# Altium PCB SchematicBKP.PcbDoc (part 2 of 2)
Units mm, origin at the board's own origin, x right, y up, seen from the top; angles counter-clockwise.
Board outline 121.41 x 45.21 mm, 2 copper layers (Top Layer, Bottom Layer); 55 components, 98 nets, 201 pads, 241 vias.
Unrouted connection lines stored in the file: 65.
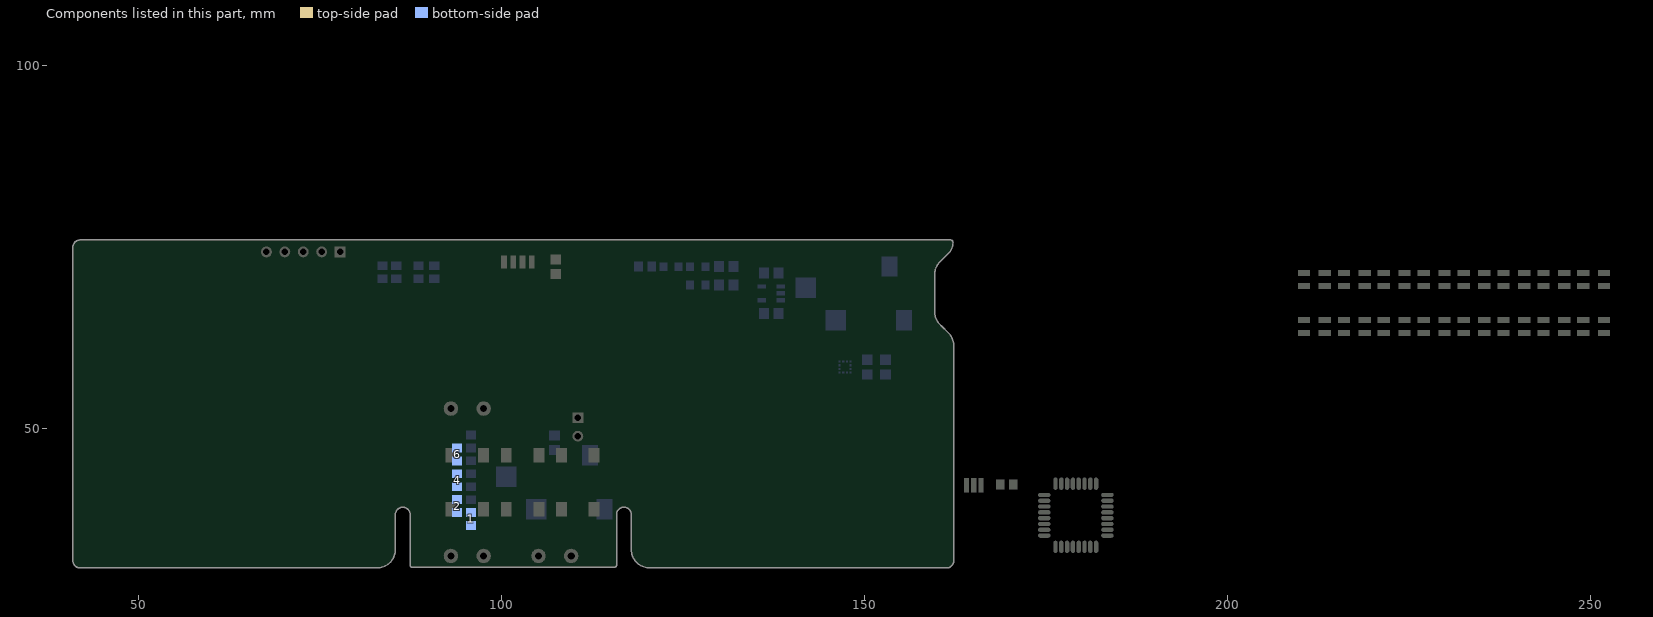
[diagram p2: the components of this part, seen from the top]

## Via types
v1: diameter 0.711, hole 0.4, Top Layer to Bottom Layer, 189 vias
v2: diameter 0.711, hole 0.4, Top Layer to Bottom Layer, tented bottom, 28 vias
v3: diameter 0.711, hole 0.4, Top Layer to Bottom Layer, tented top, 10 vias
v4: diameter 2, hole 2, Top Layer to Bottom Layer, 6 vias
v5: diameter 1.702, hole 1.702, Top Layer to Bottom Layer, 4 vias
v6: diameter 3, hole 1.5, Top Layer to Bottom Layer, 2 vias
v7: diameter 0.711, hole 0.4, Top Layer to Bottom Layer, tented both sides, 1 vias
v8: diameter 0.61, hole 0.4, Top Layer to Bottom Layer, 1 vias

## Nets (pads, with @x,y where several pads share a name; then routed paths per layer and width w, separated by ;. In a path a pad name is that pad's centre, name@x,y a point inside that pad or via, vN(x,y) a via of type N, cw(c..) or ccw(c..) an arc to the next point about the centre after c; other vN are vias at no path point) (continued)
copper on no net: | length 5399.9
  Top Layer w0.178: 44.704,35.56 v1(45.974,35.56) ; v1(48.895,34.29) 48.895,37.592 ; 49.403,37.465 49.276,37.338 49.276,35.179 49.53,34.925 v1(50.292,34.925) ; 49.911,37.338 49.657,37.084 49.657,35.814 49.911,35.56 v1(51.054,35.56) ; v1(50.292,36.195) 50.292,37.084 50.419,37.211 ; v1(52.07,37.592) 52.07,36.864 52.324,36.61 ; 54.356,37.338 54.356,35.179 54.61,34.925 v1(55.372,34.925) ; 54.864,37.211 54.737,37.084 54.737,35.814 54.991,35.56 v1(56.134,35.56) ; v1(55.372,36.195) 55.372,37.084 ; v1(57.023,37.592) 57.023,36.991 57.404,36.61 ; 57.404,34.51 57.404,35.306 57.658,35.56 58.039,35.56 ; 57.404,41.69 57.404,40.894 57.15,40.64 56.769,40.64 56.515,40.386 56.515,38.735 56.769,38.481 v1(57.658,38.481) ; 59.436,37.338 59.436,35.179 59.69,34.925 v2(60.452,34.925) ; 59.944,37.211 59.817,37.084 59.817,35.814 60.071,35.56 v2(61.214,35.56) ; v1(62.23,37.592) 62.23,36.864 62.484,36.61 ; v1(67.31,37.592) 67.31,36.864 67.564,36.61 ; 69.596,37.338 69.596,35.179 69.85,34.925 v2(70.612,34.925) ; 70.104,37.211 69.977,37.084 69.977,35.814 70.231,35.56 v2(71.374,35.56) ; v2(70.612,36.195) 70.612,37.084 ; v1(72.39,37.592) 72.39,36.864 72.644,36.61 ; 74.676,37.338 74.676,35.179 74.93,34.925 v2(75.692,34.925) ; 75.184,37.211 75.057,37.084 75.057,35.814 75.311,35.56 v2(76.454,35.56) ; v2(75.692,36.195) 75.692,37.084 ; v1(77.47,37.592) 77.47,36.864 77.724,36.61 ; 79.756,40.259 79.756,35.179 80.01,34.925 v2(80.772,34.925) ; 80.264,40.132 80.137,40.005 80.137,35.814 80.391,35.56 v2(81.534,35.56) ; v2(80.772,36.195) 80.518,36.449 80.518,39.751 80.772,40.005 ; 81.28,39.878 80.899,39.497 80.899,37.465 v2(81.534,36.83) ; v1(121.666,35.56) 122.682,35.56 123.063,35.941 123.063,40.005 122.936,40.132 ; v1(121.666,36.83) 122.301,37.465 122.301,39.497 121.92,39.878 ; v1(122.428,34.925) 122.809,34.925 123.444,35.56 123.444,40.259 ; v1(122.428,36.195) 122.682,36.449 122.682,39.751 122.428,40.005 ; 124.621,39.59 125.476,39.59 ; 124.621,44.67 125.476,44.67 ; 124.621,49.75 125.476,49.75 ; 124.621,54.83 125.476,54.83 ; 124.621,59.91 125.476,59.91 ; 124.621,64.99 125.476,64.99 ; 125.476,36.61 125.73,36.864 v1(125.73,37.592) ; v1(126.746,35.56) 127.762,35.56 128.143,35.941 128.143,37.084 128.016,37.211 ; v1(127.508,34.925) 127.889,34.925 128.524,35.56 128.524,37.338 ; 130.556,36.61 130.81,36.864 v1(130.81,37.592) ; v1(131.826,35.56) 132.842,35.56 133.223,35.941 133.223,37.084 133.096,37.211 ; v1(131.826,36.83) 131.826,37.465 ; v1(132.588,34.925) 132.969,34.925 133.604,35.56 133.604,37.338 ; 135.636,36.61 135.89,36.864 v1(135.89,37.592) ; 135.636,56.93 135.636,57.658 136.017,58.039 140.462,58.039 140.716,57.785 140.716,56.93 ; 138.883,59.97 138.938,60.025 ; 140.716,36.61 140.97,36.864 v1(140.97,37.592) ; v1(141.986,35.56) 143.002,35.56 143.383,35.941 143.383,37.084 143.256,37.211 ; v1(142.748,34.925) 143.129,34.925 143.764,35.56 143.764,37.338 ; 145.796,36.61 146.304,37.118 v1(146.304,37.592) ; v1(147.066,35.56) 148.082,35.56 148.463,35.941 148.463,37.084 148.336,37.211 ; v1(147.828,34.925) 148.209,34.925 148.844,35.56 148.844,37.338 ; v1(147.828,36.195) 147.828,37.084 ; 150.876,36.61 150.876,36.957 v1(151.511,37.592) ; v1(152.146,35.56) 153.162,35.56 153.543,35.941 153.543,37.084 153.416,37.211 ; v1(152.908,34.925) 153.289,34.925 153.924,35.56 153.924,37.338 ; 155.956,36.61 156.21,36.864 v1(156.21,37.592) ; v1(157.226,34.29) 158.369,34.29 ; v1(157.226,35.56) 158.242,35.56 158.623,35.941 158.623,36.716
  Top Layer w0.254: v1(43.688,50.546) 43.688,70.485 45.373,72.17 47.244,72.17 52.324,72.17 57.404,72.17 62.484,72.17 67.564,72.17 v1(68.834,72.17) ; v1(43.942,34.29) 43.434,34.798 43.434,48.895 44.45,49.911 44.45,66.421 45.119,67.09 47.244,67.09 ; 44.704,35.56 44.45,35.814 44.45,48.387 45.466,49.403 45.466,56.515 45.881,56.93 47.244,56.93 ; v1(45.212,34.925) 44.45,34.925 43.942,35.433 43.942,48.641 44.958,49.657 44.958,61.468 45.5,62.01 47.244,62.01 ; v1(45.212,36.195) 45.212,36.703 44.958,36.957 44.958,48.133 45.974,49.149 45.974,51.435 46.389,51.85 47.244,51.85 ; v1(45.974,36.83) 45.466,37.338 45.466,46.431 45.805,46.77 47.244,46.77 ; v1(46.863,37.592) 47.244,37.211 47.244,36.61 ; 47.244,34.51 47.244,35.306 47.498,35.56 48.133,35.56 48.387,35.814 48.387,62.992 47.244,64.135 47.244,64.99 47.244,65.659 47.498,65.913 48.006,65.913 48.387,66.294 48.387,70.07 ; 47.244,39.59 48.353,39.59 ; 47.244,41.69 46.262,41.69 45.974,41.402 45.974,38.735 46.355,38.354 v1(47.625,38.354) ; 47.244,44.67 48.353,44.67 ; 47.244,49.75 48.353,49.75 ; 47.244,54.83 48.353,54.83 ; 47.244,59.91 48.353,59.91 ; 47.244,70.07 48.387,70.07 ; 48.895,37.592 48.895,63.627 48.514,64.008 48.514,65.659 49.945,67.09 52.324,67.09 ; v1(48.895,71.12) 48.895,70.358 48.607,70.07 48.387,70.07 ; 49.403,37.465 49.403,61.722 49.691,62.01 52.324,62.01 ; 49.911,37.338 49.911,56.591 50.25,56.93 52.324,56.93 ; 50.419,37.211 50.419,51.435 50.834,51.85 52.324,51.85 ; v1(51.054,36.83) 50.927,36.957 50.927,46.482 51.215,46.77 52.324,46.77 ; 52.324,34.51 52.324,35.306 52.578,35.56 53.213,35.56 53.34,35.687 53.34,52.832 52.324,53.848 52.324,54.83 52.324,55.626 52.578,55.88 53.213,55.88 53.467,56.134 53.467,58.039 52.324,59.182 52.324,59.91 52.324,60.579 52.578,60.833 53.213,60.833 53.34,60.96 53.34,64.956 53.306,64.99 52.324,64.99 ; 52.324,39.59 53.306,39.59 ; 52.324,41.69 v1(52.324,42.926) ; 52.324,44.67 53.306,44.67 ; 52.324,49.75 53.306,49.75 ; 52.324,70.07 53.34,70.07 ; 53.34,64.99 53.34,70.07 ; v1(53.848,34.29) 53.848,51.308 54.991,52.451 54.991,66.294 55.787,67.09 57.404,67.09 ; v2(53.975,71.12) 53.975,70.358 53.687,70.07 53.34,70.07 ; 54.356,37.338 54.356,51.054 55.499,52.197 55.499,61.798 55.711,62.01 57.404,62.01 ; 54.864,37.211 54.864,50.8 56.007,51.943 56.007,56.515 56.422,56.93 57.404,56.93 ; 55.372,37.084 55.372,49.898 56.401,50.927 57.15,50.927 57.404,51.181 57.404,51.85 ; v1(56.134,36.83) 56.134,37.338 55.88,37.592 55.88,46.355 56.295,46.77 57.404,46.77 ; 57.404,39.59 58.386,39.59 ; 57.404,44.67 58.386,44.67 ; 57.404,49.75 58.386,49.75 ; 57.404,59.91 58.42,59.91 ; 57.404,64.99 58.386,64.99 ; 57.404,70.07 58.42,70.07 ; 58.039,35.56 58.166,35.56 58.42,35.814 58.42,52.942 57.404,53.958 57.404,54.83 57.404,55.499 57.658,55.753 58.166,55.753 58.42,56.007 58.42,59.91 ; v1(58.674,54.737) 58.674,55.355 58.928,55.609 58.928,62.103 v1(59.69,62.865) ; v1(58.928,34.29) 58.928,53.467 59.436,53.975 59.436,61.214 61.468,63.246 61.468,66.929 61.629,67.09 62.484,67.09 63.28,67.09 63.881,67.691 66.074,67.691 66.675,67.09 67.564,67.09 ; v2(59.055,71.12) 59.055,70.358 58.767,70.07 58.42,70.07 ; 59.436,37.338 59.436,53.213 59.944,53.721 59.944,60.96 60.994,62.01 62.484,62.01 62.484,63.119 62.738,63.373 67.31,63.373 67.564,63.119 67.564,62.01 ; 59.944,37.211 59.944,52.959 60.452,53.467 60.452,56.515 60.867,56.93 62.484,56.93 62.484,57.912 62.865,58.293 67.183,58.293 67.564,57.912 67.564,56.93 ; v2(60.452,36.195) 60.452,51.308 60.994,51.85 62.484,51.85 ; v2(61.214,36.83) 61.214,37.465 60.96,37.719 60.96,46.228 61.502,46.77 62.484,46.77 ; 62.484,34.51 62.484,35.306 62.738,35.56 63.246,35.56 63.5,35.814 63.5,39.59 ; 62.484,39.59 63.5,39.59 ; 62.484,41.69 61.756,41.69 61.468,41.402 61.468,38.608 61.595,38.481 v1(62.738,38.481) ; 62.484,44.67 63.5,44.67 ; 62.484,49.75 63.5,49.75 ; 62.484,54.83 62.484,53.848 63.5,52.832 63.5,52.578 ; 62.484,59.91 62.484,59.182 62.865,58.801 66.548,58.801 ; 62.484,64.99 62.484,64.135 62.738,63.881 67.945,63.881 68.58,63.246 68.58,61.214 68.326,60.96 66.802,60.96 66.548,60.706 66.548,58.801 ; 62.484,70.07 64.135,70.07 ; v1(63.881,55.372) 64.314,55.805 64.314,56.87 ; v2(64.135,71.12) 64.135,70.07 ; v1(64.262,62.484) 64.262,60.024 64.316,59.97 ; v1(64.516,36.195) 64.135,36.576 64.135,51.308 64.677,51.85 67.564,51.85 ; v1(65.659,36.83) 64.77,37.719 64.77,41.021 66.421,42.672 66.421,46.516 66.675,46.77 67.564,46.77 ; 65.732,59.97 65.786,60.024 v1(65.786,62.484) ; v1(65.913,38.481) 65.913,41.148 66.455,41.69 67.564,41.69 ; 66.421,63.881 66.421,65.786 66.675,66.04 68.326,66.04 68.58,66.294 68.58,67.945 68.326,68.199 66.675,68.199 66.167,68.707 66.167,69.596 65.693,70.07 64.135,70.07 ; 67.564,34.51 67.564,35.306 67.818,35.56 68.326,35.56 68.58,35.814 68.58,54.864 ; 67.564,39.59 68.546,39.59 ; 67.564,44.67 68.546,44.67 ; 67.564,49.75 68.546,49.75 ; 67.564,54.83 68.546,54.83 68.58,54.864 ; 67.564,59.91 69.054,59.91 ; 67.564,64.99 69.088,64.99 ; 67.564,70.07 69.088,70.07 ; v1(69.088,34.29) 69.088,52.197 70.104,53.213 70.104,63.627 70.866,64.389 70.866,66.548 71.408,67.09 72.644,67.09 ; v1(69.088,71.12) 69.088,70.07 ; 69.596,37.338 69.596,51.943 70.612,52.959 70.612,61.722 70.9,62.01 72.644,62.01 ; 70.104,37.211 70.104,51.689 71.12,52.705 71.12,56.642 71.408,56.93 72.644,56.93 ; 70.612,37.084 70.612,51.435 71.027,51.85 72.644,51.85 ; v2(71.374,36.83) 71.374,37.338 71.12,37.592 71.12,46.482 71.408,46.77 72.644,46.77 ; v1(71.408,72.17) 72.644,72.17 73.406,72.17 73.753,72.517 76.488,72.517 76.835,72.17 77.724,72.17 82.804,72.17 83.786,72.17 85.09,70.866 85.09,66.675 84.328,65.913 84.328,59.055 84.836,58.547 118.237,58.547 118.872,59.182 118.872,71.501 119.541,72.17 120.396,72.17 125.476,72.17 130.556,72.17 135.636,72.17 140.716,72.17 145.034,72.17 145.796,72.17 150.876,72.17 155.956,72.17 ; 72.644,34.51 72.644,35.306 72.898,35.56 73.279,35.56 73.66,35.941 73.66,52.578 73.406,52.832 72.009,52.832 71.628,53.213 71.628,54.61 71.848,54.83 72.644,54.83 72.644,55.626 72.898,55.88 73.406,55.88 73.66,56.134 73.66,57.658 73.406,57.912 71.882,57.912 71.628,58.166 71.628,59.69 71.848,59.91 72.644,59.91 73.372,59.91 73.66,60.198 73.66,64.99 ; 72.644,39.59 73.626,39.59 ; 72.644,41.69 v2(72.644,42.926) ; 72.644,44.67 73.626,44.67 ; 72.644,49.75 73.626,49.75 ; 72.644,64.99 73.66,64.99 ; 72.644,70.07 73.66,70.07 ; v2(72.771,53.594) 73.533,53.594 74.168,54.229 74.168,58.039 74.676,58.547 74.676,66.294 75.311,66.929 v1(75.311,67.183) ; v1(72.771,58.674) 73.787,58.674 74.168,59.055 74.168,66.548 74.422,66.802 v1(74.422,67.691) ; v1(74.168,34.29) 74.168,51.816 75.184,52.832 75.184,57.531 75.819,58.166 75.819,65.278 76.708,66.167 77.47,66.167 77.724,66.421 77.724,67.09 ; v2(74.295,53.213) 74.676,53.594 74.676,57.785 75.184,58.293 75.184,65.532 76.2,66.548 v1(76.2,67.691) ; v1(74.422,71.628) 74.422,70.485 74.007,70.07 73.66,70.07 ; 74.676,37.338 74.676,51.562 75.692,52.578 75.692,57.226 76.314,57.848 76.314,61.709 76.615,62.01 77.724,62.01 ; 75.184,37.211 75.184,51.308 76.2,52.324 76.2,56.515 76.615,56.93 77.724,56.93 ; 75.692,37.084 75.692,51.054 76.488,51.85 77.724,51.85 ; v2(76.454,36.83) 76.454,37.338 76.2,37.592 76.2,46.355 76.615,46.77 77.724,46.77 ; 77.724,34.51 77.724,35.306 77.978,35.56 78.486,35.56 78.74,35.814 78.74,52.705 78.613,52.832 78.105,52.832 77.724,53.213 77.724,54.83 77.724,55.626 77.978,55.88 78.486,55.88 78.74,56.134 78.74,70.07 ; 77.724,39.59 78.706,39.59 ; 77.724,41.69 v2(77.724,42.926) ; 77.724,44.67 78.706,44.67 ; 77.724,49.75 78.706,49.75 ; 77.724,59.91 78.706,59.91 ; 77.724,64.99 78.706,64.99 ; 77.724,70.07 78.74,70.07 ; v1(79.248,34.29) 79.248,52.705 79.756,53.213 79.756,57.023 81.28,58.547 81.28,62.23 81.788,62.738 81.788,66.802 82.076,67.09 82.804,67.09 ; v1(79.375,71.12) 79.375,70.358 79.087,70.07 78.74,70.07 ; 79.756,40.259 79.756,52.451 80.264,52.959 80.264,56.769 81.788,58.293 81.788,61.722 82.076,62.01 82.804,62.01 ; v1(80.137,70.104) 82.77,70.104 82.804,70.07 82.804,69.088 83.82,68.072 83.82,64.99 ; 80.264,40.132 80.264,52.197 80.772,52.705 80.772,56.515 81.187,56.93 82.804,56.93 ; 80.772,40.005 80.772,51.562 81.06,51.85 82.804,51.85 ; 81.28,39.878 81.28,46.355 81.695,46.77 82.804,46.77 ; v1(81.534,37.846) 82.296,37.846 82.804,37.338 82.804,36.61 ; v2(81.534,39.116) 81.788,39.37 81.788,40.259 82.169,40.64 82.55,40.64 82.804,40.894 82.804,41.69 ; 82.804,34.51 82.804,35.306 83.058,35.56 83.566,35.56 83.82,35.814 83.82,59.944 ; 82.804,39.59 83.727,39.59 ; 82.804,44.67 83.727,44.67 ; 82.804,49.75 83.727,49.75 ; 82.804,54.83 83.727,54.83 ; 82.804,59.91 83.786,59.91 ; 82.804,64.99 83.82,64.99 ; 83.786,59.944 83.82,59.944 ; v1(84.709,55.753) 86.487,57.531 116.586,57.531 v1(118.618,55.499) ; v1(84.709,56.769) 84.709,56.896 85.852,58.039 117.094,58.039 v1(118.618,56.515) ; 86.919,62.814 87.706,62.814 88.011,63.119 88.011,65.405 86.106,67.31 86.106,70.358 86.995,71.247 93.98,71.247 v1(95.377,72.644) ; v3(97.536,64.389) 100.584,61.341 v3(106.68,61.341) ; v3(98.933,64.389) 101.219,62.103 v3(105.918,62.103) ; 119.414,39.59 120.396,39.59 ; 119.414,44.67 120.396,44.67 ; 119.414,49.75 120.396,49.75 ; 119.414,54.83 120.396,54.83 ; 119.414,59.91 120.396,59.91 ; 119.414,64.99 120.396,64.99 ; 120.396,36.61 120.396,37.338 120.904,37.846 v1(121.666,37.846) ; 120.396,41.69 121.124,41.69 121.412,41.402 121.412,39.37 v1(121.666,39.116) ; 120.396,46.77 121.378,46.77 121.92,46.228 121.92,39.878 ; 120.396,51.85 122.013,51.85 122.428,51.435 122.428,40.005 ; 120.396,56.93 122.521,56.93 122.936,56.515 122.936,40.132 ; 120.396,62.01 123.029,62.01 123.444,61.595 123.444,40.259 ; 120.396,67.09 123.537,67.09 123.952,66.675 v1(123.952,34.29) ; 120.396,70.07 119.6,70.07 119.38,69.85 119.38,34.671 119.541,34.51 120.396,34.51 120.396,33.655 120.65,33.401 v1(158.115,33.401) ; 125.476,34.51 125.476,35.306 125.222,35.56 124.714,35.56 124.46,35.814 124.46,69.85 124.68,70.07 125.476,70.07 ; 125.476,41.69 v1(125.476,43.053) ; 125.476,46.77 126.585,46.77 127,46.355 127,37.846 126.746,37.592 v1(126.746,36.83) ; v1(125.476,48.641) 125.476,49.75 ; 125.476,51.85 126.966,51.85 127.508,51.308 v1(127.508,36.195) ; 125.476,56.93 125.476,56.261 125.73,56.007 127,56.007 128.016,54.991 128.016,37.211 ; 125.476,62.01 126.458,62.01 126.873,61.595 126.873,56.896 128.524,55.245 128.524,37.338 ; 125.476,67.09 126.966,67.09 127.381,66.675 127.381,57.15 129.032,55.499 v1(129.032,34.29) ; 129.574,39.59 130.556,39.59 ; 129.574,44.67 130.556,44.67 ; 129.574,54.83 130.556,54.83 ; 129.574,59.91 130.556,59.91 ; 130.556,34.51 130.556,35.306 130.429,35.433 129.794,35.433 129.54,35.687 129.54,49.75 ; 130.556,41.69 v1(130.556,43.053) ; 130.556,46.77 131.665,46.77 132.08,46.355 132.08,37.719 131.826,37.465 ; 130.556,51.85 132.046,51.85 132.588,51.308 v1(132.588,36.195) ; 130.556,56.93 132.046,56.93 132.588,56.388 132.588,54.864 133.096,54.356 133.096,37.211 ; 130.556,62.01 132.554,62.01 133.096,61.468 133.096,55.118 133.604,54.61 133.604,37.338 ; 130.556,67.09 133.189,67.09 133.604,66.675 133.604,55.372 134.112,54.864 v1(134.112,34.29) ; 130.556,70.07 129.76,70.07 129.54,69.85 129.54,66.294 129.921,65.913 130.429,65.913 130.556,65.786 130.556,64.99 130.556,64.008 129.54,62.992 129.54,49.75 ; v1(131.826,49.022) 131.284,49.022 130.556,49.75 129.54,49.75 ; 134.654,44.67 135.636,44.67 ; 134.654,49.75 135.636,49.75 v1(136.618,49.75) ; 134.747,39.59 135.636,39.59 ; 135.636,34.51 135.636,35.306 135.509,35.433 134.874,35.433 134.62,35.687 134.62,54.83 ; 135.636,41.69 v1(135.636,43.053) ; 135.636,46.77 136.491,46.77 136.652,46.609 136.652,38.1 v1(137.922,36.83) ; 135.636,51.85 137.126,51.85 137.414,51.562 137.414,44.069 138.43,43.053 139.065,43.053 139.7,42.418 139.7,38.608 139.192,38.1 139.192,36.449 v1(138.938,36.195) ; 135.636,54.83 134.62,54.83 ; 135.636,59.91 134.112,59.91 ; 135.636,62.01 140.716,62.01 141.444,62.01 141.732,61.722 141.732,58.039 142.24,57.531 143.256,57.531 143.764,57.023 143.764,37.338 ; 135.636,64.99 134.112,64.99 ; 135.636,67.09 140.716,67.09 142.587,67.09 143.256,66.421 143.256,58.293 144.272,57.277 v1(144.272,34.29) ; 135.636,70.07 134.332,70.07 134.112,69.85 134.112,64.99 ; v1(137.287,58.674) 137.469,58.856 137.469,59.97 ; v2(137.466,55.424) 137.466,56.87 ; 138.883,59.97 138.938,59.915 v1(138.938,58.674) ; 139.734,49.75 140.716,49.75 ; 140.716,34.51 140.716,35.306 140.462,35.56 139.954,35.56 139.7,35.814 139.7,37.719 140.716,38.735 140.716,39.59 141.571,39.59 141.732,39.751 141.732,43.18 141.224,43.688 140.843,43.688 140.716,43.815 140.716,44.67 140.052,44.67 139.7,45.021 139.7,52.324 ; 140.716,41.69 v1(140.716,42.799) ; 140.716,46.77 141.825,46.77 142.24,46.355 142.24,37.846 141.986,37.592 v1(141.986,36.83) ; 140.716,51.85 142.46,51.85 142.748,51.562 v1(142.748,36.195) ; 140.716,54.83 140.716,53.848 139.7,52.832 139.7,52.324 ; 140.716,56.93 142.841,56.93 143.256,56.515 143.256,37.211 ; 140.716,59.91 140.716,60.833 140.589,60.96 139.954,60.96 139.446,61.468 136.906,61.468 136.652,61.214 136.652,60.96 ; 140.716,64.99 136.906,64.99 ; v1(144.348,69.012) 143.29,70.07 140.716,70.07 139.158,70.07 137.668,68.58 135.001,68.58 134.62,68.199 134.62,66.294 134.874,66.04 136.525,66.04 136.906,65.659 136.906,64.99 ; 144.814,39.59 145.796,39.59 ; 144.814,44.67 145.796,44.67 ; 144.814,49.75 145.796,49.75 ; 144.814,54.83 145.796,54.83 ; 144.814,59.91 145.796,59.91 ; 144.814,64.99 145.796,64.99 ; v1(145.542,38.354) 146.558,38.354 146.812,38.608 146.812,41.402 146.524,41.69 145.796,41.69 ; 145.796,34.51 145.796,35.306 145.542,35.56 145.034,35.56 144.78,35.814 144.78,67.945 145.796,68.961 145.796,70.07 148.665,70.07 v1(148.705,70.03) ; 145.796,46.77 145.796,45.974 145.923,45.847 146.939,45.847 147.32,45.466 147.32,37.973 147.066,37.719 v1(147.066,36.83) ; 145.796,51.85 146.651,51.85 146.812,51.689 146.812,46.736 147.828,45.72 147.828,37.084 ; 145.796,56.93 146.524,56.93 146.812,56.642 146.812,54.356 147.32,53.848 147.32,46.99 148.336,45.974 148.336,37.211 ; 145.796,62.01 147.032,62.01 147.32,61.722 147.32,54.61 147.828,54.102 147.828,47.244 148.844,46.228 148.844,37.338 ; 145.796,67.09 147.159,67.09 147.701,66.548 147.701,64.262 147.828,64.135 147.828,54.864 148.336,54.356 148.336,47.498 149.352,46.482 v1(149.352,34.29) ; 149.894,39.59 150.876,39.59 ; 149.894,44.67 150.876,44.67 ; 149.894,54.83 150.876,54.83 ; 149.894,59.91 150.876,59.91 ; 149.894,64.99 150.876,64.99 ; 150.876,34.51 150.876,35.306 150.749,35.433 150.114,35.433 149.86,35.687 149.86,47.498 150.876,48.514 150.876,49.75 150.876,50.546 150.622,50.8 150.114,50.8 149.86,51.054 149.86,69.85 150.08,70.07 150.876,70.07 v1(152.366,70.07) ; v1(150.876,38.354) 151.511,38.354 151.892,38.735 151.892,41.402 151.604,41.69 150.876,41.69 ; 150.876,46.77 150.876,45.974 151.003,45.847 151.638,45.847 151.892,45.593 151.892,42.799 152.4,42.291 152.4,37.084 v1(152.146,36.83) ; 150.876,51.85 151.731,51.85 151.892,51.689 151.892,51.308 152.4,50.8 152.4,43.053 152.908,42.545 v1(152.908,36.195) ; 150.876,56.93 151.985,56.93 152.4,56.515 152.4,51.689 152.908,51.181 152.908,43.307 153.416,42.799 153.416,37.211 ; 150.876,62.01 152.493,62.01 152.908,61.595 152.908,51.943 153.416,51.435 153.416,43.561 153.924,43.053 153.924,37.338 ; 150.876,67.09 152.493,67.09 152.781,66.802 152.781,63.5 153.416,62.865 153.416,52.197 153.924,51.689 153.924,43.815 154.432,43.307 v1(154.432,34.29) ; v1(154.178,52.832) 154.178,52.324 154.432,52.07 154.432,44.196 v1(155.194,43.434) ; 154.974,39.59 155.956,39.59 ; 154.974,49.75 155.956,49.75 ; 154.974,54.83 155.956,54.83 ; 154.974,59.91 155.956,59.91 155.956,58.801 156.337,58.42 v1(156.845,58.42) ; 155.956,34.51 155.956,35.306 155.829,35.433 155.321,35.433 154.94,35.814 154.94,42.418 155.194,42.672 155.702,42.672 155.956,42.926 155.956,44.67 155.101,44.67 154.94,44.831 154.94,62.738 155.194,62.992 156.21,62.992 156.464,63.246 156.464,63.754 155.956,64.262 155.956,64.99 155.194,64.99 154.94,65.244 154.94,66.319 154.584,66.675 153.695,66.675 152.781,67.589 152.781,69.342 153.509,70.07 155.956,70.07 ; 155.956,41.69 156.752,41.69 156.972,41.91 156.972,42.545 v1(156.718,42.799) ; 155.956,46.77 157.192,46.77 157.48,46.482 157.48,38.1 157.226,37.846 v1(157.226,36.83) ; 155.956,51.85 157.573,51.85 157.988,51.435 v1(157.988,36.195) ; 155.956,56.93 158.081,56.93 158.496,56.515 158.496,36.83 158.61,36.716 ; 155.956,62.01 157.573,62.01 159.004,60.579 159.004,37.084 159.258,36.83 159.258,35.179 159.004,34.925 v1(157.988,34.925) ; 155.956,67.09 156.811,67.09 157.226,66.675 157.226,63.119 159.512,60.833 159.512,37.338 159.766,37.084 159.766,34.544 159.512,34.29 158.369,34.29 ; 58.42,59.91 58.42,70.07 ; 63.5,39.59 63.5,44.67 ; 63.5,44.67 63.5,49.75 ; 63.5,49.75 63.5,52.578 ; 63.5,52.578 66.04,52.578 66.548,53.086 66.548,55.626 66.802,55.88 68.326,55.88 68.58,56.134 68.58,58.293 68.072,58.801 66.548,58.801 ; 68.58,54.864 69.088,55.372 69.088,64.99 ; 69.088,64.99 69.088,70.07 ; 73.66,64.99 73.66,70.07 ; 83.82,59.944 83.82,64.99 ; 134.112,59.91 134.112,64.99 ; 134.112,59.91 134.112,55.626 134.62,55.118 134.62,54.83 ; 136.652,60.96 136.652,59.055 136.525,58.928 135.001,58.928 134.62,58.547 134.62,56.134 134.874,55.88 136.398,55.88 136.652,55.626 136.652,53.086 137.414,52.324 139.7,52.324 ; 136.652,60.96 134.874,60.96 134.62,61.214 134.62,63.373 135.128,63.881 136.525,63.881 136.906,64.262 136.906,64.99
  Bottom Layer w0.178: v1(43.942,34.29) v1(48.895,34.29) v1(53.848,34.29) v1(58.928,34.29) v1(69.088,34.29) v1(74.168,34.29) v1(79.248,34.29) 83.82,34.29 84.074,34.544 84.074,41.275 ; 44.45,35.814 44.704,35.56 v1(45.974,35.56) v1(51.054,35.56) v1(56.134,35.56) v2(61.214,35.56) v2(71.374,35.56) v2(76.454,35.56) v2(81.534,35.56) 83.058,35.56 83.312,35.814 83.312,40.386 83.058,40.64 ; v1(45.212,34.925) v1(50.292,34.925) v1(55.372,34.925) v2(60.452,34.925) v2(70.612,34.925) v2(75.692,34.925) v2(80.772,34.925) 83.439,34.925 83.693,35.179 83.693,40.64 83.566,40.767 83.566,41.275 ; v1(45.212,36.195) v1(50.292,36.195) v1(55.372,36.195) v2(60.452,36.195) v1(64.516,36.195) v2(70.612,36.195) v2(75.692,36.195) v2(80.772,36.195) 82.677,36.195 82.931,36.449 82.931,40.132 82.55,40.513 ; v1(45.974,36.83) v1(51.054,36.83) v1(56.134,36.83) v2(61.214,36.83) v1(65.659,36.83) v2(71.374,36.83) v2(76.454,36.83) v2(81.534,36.83) 82.296,36.83 82.55,37.084 82.55,39.878 82.042,40.386 ; v1(81.534,37.846) 81.915,37.846 82.169,38.1 82.169,39.624 81.534,40.259 ; 97.74,66.3 99.015,65.024 101.092,65.024 ; 98.093,66.653 99.214,65.532 101.092,65.532 ; 98.447,67.007 99.414,66.04 101.092,66.04 ; 98.8,67.36 99.613,66.548 101.092,66.548 ; 99.154,67.714 99.812,67.056 101.092,67.056 ; 99.508,68.067 100.011,67.564 101.092,67.564 ; 119.126,41.402 119.126,34.544 119.38,34.29 v1(123.952,34.29) v1(129.032,34.29) v1(134.112,34.29) v1(144.272,34.29) v1(149.352,34.29) v1(154.432,34.29) v1(157.226,34.29) ; 119.634,41.402 119.634,40.894 119.507,40.767 119.507,35.179 119.761,34.925 v1(122.428,34.925) v1(127.508,34.925) v1(132.588,34.925) v1(142.748,34.925) v1(147.828,34.925) v1(152.908,34.925) v1(157.988,34.925) ; 120.142,40.64 119.888,40.386 119.888,35.814 120.142,35.56 v1(121.666,35.56) v1(126.746,35.56) v1(131.826,35.56) v1(141.986,35.56) v1(147.066,35.56) v1(152.146,35.56) v1(157.226,35.56) ; 120.65,40.513 120.269,40.132 120.269,36.449 120.523,36.195 v1(122.428,36.195) v1(127.508,36.195) v1(132.588,36.195) v1(138.938,36.195) v1(142.748,36.195) v1(147.828,36.195) v1(152.908,36.195) v1(157.988,36.195) ; 121.158,40.386 120.625,39.853 120.625,37.109 120.904,36.83 v1(121.666,36.83) v1(126.746,36.83) v1(131.826,36.83) v1(137.922,36.83) v1(141.986,36.83) v1(147.066,36.83) v1(152.146,36.83) v1(157.226,36.83) ; 121.666,40.259 120.98,39.573 120.98,38.151 121.285,37.846 v1(121.666,37.846) 122.174,37.846 122.428,37.592 v1(125.73,37.592) v1(130.81,37.592) v1(135.89,37.592) v1(140.97,37.592) v1(146.304,37.592) v1(151.511,37.592) v1(156.21,37.592) ; 143.117,46.228 143.244,46.355 146.05,46.355 146.431,45.974 146.431,44.831 146.05,44.45 144.555,44.45
  Bottom Layer w0.254: v1(43.688,50.546) 48.79,50.546 ; 43.815,61.595 43.815,53.34 44.45,52.705 51.435,52.705 52.07,53.34 52.07,54.61 52.705,55.245 56.74,55.245 ; 43.815,62.865 43.815,70.485 44.45,71.12 v1(48.895,71.12) ; v1(43.942,34.29) 43.434,34.798 43.434,48.006 44.704,49.276 48.79,49.276 ; 44.323,61.595 44.323,54.61 44.958,53.975 49.94,53.975 ; 44.323,62.865 44.323,69.85 44.831,70.358 49.403,70.358 50.165,71.12 v2(53.975,71.12) ; 44.45,35.814 44.45,45.466 45.72,46.736 48.79,46.736 ; 44.831,61.595 44.831,55.88 45.466,55.245 49.94,55.245 ; 44.831,62.865 44.831,69.215 45.466,69.85 50.165,69.85 50.673,70.358 54.483,70.358 55.245,71.12 v2(59.055,71.12) ; v1(45.212,34.925) 44.45,34.925 43.942,35.433 43.942,46.736 45.212,48.006 48.79,48.006 ; v1(45.212,36.195) 45.212,36.703 44.958,36.957 44.958,43.942 46.482,45.466 48.79,45.466 ; 45.339,61.595 45.339,57.15 45.974,56.515 49.94,56.515 ; 45.339,62.865 45.339,68.58 46.101,69.342 50.927,69.342 51.435,69.85 55.22,69.85 55.728,70.358 59.563,70.358 60.325,71.12 v2(64.135,71.12) ; 45.847,61.595 45.847,58.42 46.482,57.785 49.94,57.785 ; 45.847,62.865 45.847,67.945 46.482,68.58 51.435,68.58 52.07,69.215 55.88,69.215 56.515,69.85 60.325,69.85 60.833,70.358 64.643,70.358 65.405,71.12 v1(69.088,71.12) ; v1(45.974,36.83) 45.466,37.338 45.466,43.561 46.101,44.196 48.79,44.196 ; 46.355,61.595 46.355,59.69 46.99,59.055 49.94,59.055 ; 46.355,62.865 46.355,67.31 46.99,67.945 51.979,67.945 52.614,68.58 56.515,68.58 57.27,69.335 60.76,69.335 61.275,69.85 65.405,69.85 65.913,70.358 70.993,70.358 72.263,71.628 v1(74.422,71.628) ; 46.863,61.595 46.863,60.833 47.371,60.325 49.94,60.325 ; 46.863,62.865 46.863,66.675 47.498,67.31 52.609,67.31 53.244,67.945 56.889,67.945 57.774,68.83 61.46,68.83 61.844,69.215 66.04,69.215 66.675,69.85 71.374,69.85 72.39,70.866 75.311,70.866 75.565,71.12 v1(79.375,71.12) ; 47.371,61.595 49.94,61.595 ; 47.371,62.865 47.371,66.04 48.006,66.675 53.189,66.675 53.824,67.31 57.4,67.31 58.319,68.23 61.883,68.23 62.234,68.58 66.675,68.58 67.31,69.215 71.628,69.215 72.517,70.104 v1(80.137,70.104) ; v1(47.625,38.354) 52.197,38.354 52.324,38.481 ; 48.79,41.656 46.609,41.656 45.974,41.021 45.974,37.973 46.355,37.592 v1(46.863,37.592) v1(52.07,37.592) v1(57.023,37.592) v1(62.23,37.592) v1(67.31,37.592) v1(72.39,37.592) v1(77.47,37.592) 80.772,37.592 81.026,37.846 v1(81.534,37.846) ; 48.79,42.926 v1(52.324,42.926) 52.324,38.481 ; 56.74,57.785 67.31,57.785 70.104,60.579 104.648,60.579 105.41,61.341 v3(106.68,61.341) 120.523,61.341 123.19,58.674 123.19,46.99 124.46,45.72 144.555,45.72 ; 56.74,59.055 67.691,59.055 69.723,61.087 104.267,61.087 105.283,62.103 v3(105.918,62.103) 120.523,62.103 123.698,58.928 123.698,47.371 124.841,46.228 143.117,46.228 ; 56.74,62.865 58.42,62.865 60.198,61.087 66.929,61.087 67.945,62.103 103.759,62.103 105.283,63.627 120.523,63.627 124.714,59.436 124.714,48.26 125.222,47.752 140.335,47.752 141.097,46.99 144.555,46.99 ; 57.89,41.656 62.992,41.656 63.627,42.291 63.627,43.688 64.135,44.196 68.043,44.196 ; 57.89,42.926 61.243,42.926 ; 57.89,44.196 61.243,44.196 ; 57.89,45.466 61.243,45.466 ; 57.89,46.736 61.243,46.736 ; 57.89,48.006 61.243,48.006 ; 57.89,49.276 61.243,49.276 ; 57.89,50.546 61.243,50.546 ; v1(58.674,54.737) 61.849,54.737 62.484,55.372 v1(63.881,55.372) ; v1(59.69,62.865) 62.357,62.865 63.5,61.722 66.421,61.722 67.31,62.611 103.505,62.611 104.14,63.246 104.14,65.532 103.632,66.04 102.362,66.04 ; v1(64.262,62.484) 65.024,63.246 65.786,63.246 66.167,63.627 102.87,63.627 103.124,63.881 103.124,64.77 102.87,65.024 102.362,65.024 ; v1(65.786,62.484) 66.421,63.119 103.251,63.119 103.632,63.5 103.632,65.151 103.251,65.532 102.362,65.532 ; 68.043,49.276 72.39,49.276 74.295,51.181 v2(74.295,53.213) ; 68.043,50.546 71.755,50.546 72.771,51.562 v2(72.771,53.594) ; 68.043,51.816 69.977,51.816 70.993,52.832 70.993,56.896 v1(72.771,58.674) ; v1(68.834,72.17) v1(71.408,72.17) ; v2(72.644,42.926) 72.644,38.481 ; v1(74.422,67.691) 74.422,66.802 74.93,66.294 88.138,66.294 89.789,64.643 94.351,64.643 95.654,65.946 ; v1(75.311,67.183) 75.692,66.802 88.392,66.802 90.043,65.151 94.152,65.151 95.3,66.3 ; v1(76.2,67.691) 76.581,67.31 88.646,67.31 90.297,65.659 93.953,65.659 94.947,66.653 ; v2(77.724,42.926) 77.724,38.481 ; v2(81.534,39.116) 81.026,39.116 ; 81.534,40.259 81.534,57.785 82.804,59.055 119.888,59.055 121.666,57.277 121.666,40.259 ; 82.042,40.386 82.042,57.531 83.058,58.547 119.73,58.547 121.158,57.119 121.158,40.386 ; 82.55,40.513 82.55,57.277 83.312,58.039 119.471,58.039 120.65,56.86 120.65,40.513 ; 83.058,40.64 83.058,57.023 83.566,57.531 119.253,57.531 120.142,56.642 120.142,40.64 ; 83.566,41.275 83.566,56.261 84.074,56.769 v1(84.709,56.769) ; 84.074,41.275 84.074,55.118 v1(84.709,55.753) ; v1(95.377,72.644) 94.996,72.263 94.996,71.872 95.654,71.214 ; 97.033,65.592 97.536,65.089 v3(97.536,64.389) ; 97.386,65.946 98.933,64.399 v3(98.933,64.389) ; 102.362,66.548 103.886,66.548 106.299,64.135 120.777,64.135 125.603,59.309 136.652,59.309 v1(137.287,58.674) ; 102.362,67.056 104.14,67.056 106.553,64.643 121.031,64.643 125.857,59.817 138.176,59.817 138.938,59.055 v1(138.938,58.674) ; 102.362,67.564 104.394,67.564 106.807,65.151 121.285,65.151 126.111,60.325 139.446,60.325 139.7,60.071 139.7,58.039 139.446,57.785 138.176,57.785 137.466,57.075 v2(137.466,55.424) ; v1(118.618,55.499) 119.126,54.991 119.126,41.402 ; v1(118.618,56.515) 119.634,55.499 119.634,41.402 ; v1(121.666,39.116) 125.476,39.116 ; v1(125.476,48.641) 125.857,48.26 140.335,48.26 145.669,53.594 154.686,53.594 154.94,53.34 154.94,52.07 ; v1(130.556,43.053) 130.556,39.116 ; v1(131.826,49.022) 132.461,49.022 132.715,48.768 139.954,48.768 145.288,54.102 154.94,54.102 155.448,53.594 155.448,52.07 ; v1(135.636,43.053) 135.636,39.116 ; v1(136.618,49.75) 137.448,49.75 137.922,49.276 139.573,49.276 144.907,54.61 155.194,54.61 155.956,53.848 155.956,52.07 ; v1(140.716,42.799) 140.716,39.116 ; v1(144.348,69.012) 146.685,66.675 148.705,66.675 150.483,64.897 150.483,62.242 151.13,61.595 154.178,61.595 155.067,60.706 155.067,55.499 156.464,54.102 156.464,52.07 ; 144.555,48.26 143.129,48.26 142.621,48.768 142.621,49.657 146.05,53.086 150.495,53.086 150.876,52.705 150.876,51.181 151.257,50.8 154.432,50.8 ; v1(148.705,70.03) 149.352,69.383 149.352,67.183 151.13,65.405 151.13,62.865 151.765,62.23 154.305,62.23 155.575,60.96 155.575,55.753 156.972,54.356 156.972,52.07 ; 151.355,41.91 152.908,41.91 153.289,42.291 153.289,42.799 155.321,44.831 156.464,44.831 157.988,46.355 157.988,50.8 ; 151.355,43.18 152.908,43.18 155.067,45.339 156.21,45.339 157.48,46.609 157.48,50.8 ; 151.355,44.45 152.908,44.45 154.305,45.847 155.956,45.847 156.972,46.863 156.972,50.8 ; 151.355,45.72 152.908,45.72 153.543,46.355 155.702,46.355 156.464,47.117 156.464,50.8 ; 151.355,46.99 155.575,46.99 155.956,47.371 155.956,50.8 ; 151.355,48.26 155.067,48.26 155.448,48.641 155.448,50.8 ; 151.355,49.53 154.559,49.53 154.94,49.911 154.94,50.8 ; v1(152.366,70.07) 155.609,70.07 156.21,69.469 156.21,67.564 157.226,66.548 157.226,62.103 156.083,60.96 156.083,56.007 157.48,54.61 157.48,52.07 ; v1(154.178,52.832) 154.432,52.578 154.432,52.07 ; v1(155.194,43.434) 155.829,44.069 157.353,44.069 158.877,42.545 158.877,34.163 v1(158.115,33.401) ; v1(156.718,42.799) 156.718,42.545 153.67,39.497 152.019,39.497 v1(150.876,38.354) v1(145.542,38.354) 144.78,39.116 140.716,39.116 ; v1(156.845,58.42) 156.845,56.007 157.988,54.864 157.988,52.07 ; 52.324,38.481 v1(57.658,38.481) v1(62.738,38.481) v1(65.913,38.481) 72.644,38.481 ; 72.644,38.481 77.724,38.481 ; 77.724,38.481 79.756,38.481 80.391,39.116 81.026,39.116 ; 81.026,39.116 81.026,58.039 82.55,59.563 120.146,59.563 122.174,57.535 122.174,45.593 124.714,43.053 v1(125.476,43.053) 125.476,39.116 ; 125.476,39.116 130.556,39.116 ; 130.556,39.116 135.636,39.116 ; 135.636,39.116 140.716,39.116
  other v1: 96.52,67.056 95.758,67.818 97.282,67.818 94.996,68.58 96.52,68.58 98.044,68.58 95.758,69.342 97.282,69.342 96.52,70.104
  other v4: 138.176,40.894 138.176,53.848 65.024,54.102 50.038,65.024 59.944,65.786 64.897,66.167
  other v5: 106.02,42.545 113.03,42.545 147.295,68.58 154.305,68.58

## Polygon pours and split planes (outlines as drawn)
GND on Bottom Layer "Top Layer-No Net1" (solid, shelved, pour order 21): 43.434,75.946 42.672,75.946 41.91,75.946 ccw(c41.91,74.93) 40.894,74.93 40.894,31.75 ccw(c41.91,31.75) 41.91,30.734 82.804,30.734 ccw(c82.804,33.274) 85.344,33.274 85.344,34.036 85.344,38.084 cw(c86.36,38.084) 86.36,39.1 cw(c86.36,38.084) 87.376,38.084 87.376,35.56 87.376,31.099 ccw(c87.63,31.099) 87.63,30.845 115.554,30.845 ccw(c115.554,31.115) 115.824,31.115 115.824,38.1 cw(c116.832,38.1) 116.832,39.108 cw(c116.832,38.084) 117.856,38.084 117.856,37.338 117.856,33.385 117.856,33.274 ccw(c120.396,33.274) 120.396,30.734 120.65,30.734 161.29,30.734 ccw(c161.29,31.75) 162.306,31.75 162.306,61.33 ccw(c159.766,61.33) 161.562,63.126 160.578,64.111 160.399,64.29 cw(c162.195,66.086) 159.655,66.086 159.655,68.596 159.655,71.133 cw(c162.195,71.133) 160.399,72.929 160.846,73.376 161.59,74.12 ccw(c160.129,75.581) 162.195,75.581 ccw(c161.829,75.581) 161.829,75.946 161.544,75.946
BAT- on Bottom Layer "Bottom Layer-ControllerGND" (solid, shelved, pour order 16): 115.57,55.245 115.57,31.115 87.63,31.115 87.63,55.245
5V on Bottom Layer "Bottom Layer-No Net" (solid, shelved, pour order 7): 146.05,63.627 141.478,63.627 cw(c141.478,65.405) 139.7,65.405 139.7,66.675 ccw(c139.319,66.675) 139.319,67.056 cw(c139.319,67.437) 138.938,67.437 cw(c139.001,67.881) 138.557,67.945 139.319,67.945 ccw(c139.319,68.072) 139.446,68.072 139.446,69.088 ccw(c139.319,69.088) 139.319,69.215 138.557,69.215 cw(c138.957,69.416) 139.065,69.85 ccw(c138.811,70.104) 139.065,70.358 137.541,70.739 cw(c138.811,70.739) 138.811,72.009 143.129,72.009 cw(c143.129,71.755) 143.383,71.755 143.383,71.501 ccw(c144.145,71.501) 144.145,70.739 145.034,70.739 cw(c145.034,69.596) 146.177,69.596 146.177,68.58 ccw(c147.32,68.58) 147.32,67.437 cw(c147.32,66.675) 148.082,66.675 148.082,66.548 148.082,65.278 cw(c147.701,65.278) 147.701,64.897
REG_TH on Bottom Layer "Bottom Layer-No Net" (solid, shelved, pour order 0): 137.16,69.278 130.238,69.278 129.286,68.326 128.778,67.818 128.778,64.77 129.54,64.008 132.588,64.008 135.89,64.008 137.16,65.278
GND on Bottom Layer "Bottom Layer-No Net" (solid, shelved, pour order 8): 135.509,72.009 135.509,70.485 ccw(c135.763,70.485) 135.763,70.231 136.398,70.231 cw(c136.398,69.85) 136.779,69.85 136.779,67.183 ccw(c137.16,67.183) 137.16,66.802 cw(c137.16,66.548) 137.414,66.548 137.414,66.421 137.414,65.405 ccw(c137.668,65.405) 137.668,65.151 138.684,65.151 ccw(c138.684,65.405) 138.938,65.405 138.938,66.675 ccw(c138.684,66.675) 138.684,66.929 137.922,66.929 cw(c137.922,67.31) 137.541,67.31 137.541,67.945 cw(c137.795,67.945) 137.795,68.199 138.938,68.199 ccw(c138.938,68.326) 139.065,68.326 139.065,68.834 ccw(c138.938,68.834) 138.938,68.961 137.795,68.961 cw(c137.795,69.215) 137.541,69.215 137.541,70.104 ccw(c137.414,70.104) 137.414,70.231 137.287,70.231 cw(c137.287,70.612) 136.906,70.612 136.906,71.628 ccw(c136.525,71.628) 136.525,72.009
no net on Bottom Layer "Bottom Layer-No Net" (solid, shelved, pour order 10): 125.476,53.213 125.476,53.594 cw(c126.111,53.594) 126.111,54.229 127.127,54.229 ccw(c127.127,54.483) 127.381,54.483 cw(c129.667,54.483) 129.667,56.769 131.445,56.769 131.699,56.769 cw(c131.699,56.261) 132.207,56.261 ccw(c132.334,56.261) 132.334,56.134 134.366,56.134 cw(c134.366,54.61) 135.89,54.61 135.89,50.927 cw(c135.255,50.927) 135.255,50.292 132.334,50.292 ccw(c132.334,50.165) 132.207,50.165 cw(c131.826,50.165) 131.826,49.784 131.445,49.784 129.667,49.784 cw(c129.667,52.07) 127.381,52.07 ccw(c127.254,52.07) 127.254,52.197 126.746,52.197 126.238,52.197 cw(c126.238,52.959) 125.476,52.959
GND on Top Layer "Top Layer-No Net" (solid, shelved, pour order 20): 43.434,75.946 42.672,75.946 41.91,75.946 ccw(c41.91,74.93) 40.894,74.93 40.894,31.75 ccw(c41.91,31.75) 41.91,30.734 82.804,30.734 ccw(c82.804,33.274) 85.344,33.274 85.344,34.036 85.344,38.084 cw(c86.36,38.084) 86.36,39.1 cw(c86.36,38.084) 87.376,38.084 87.376,35.56 87.376,31.099 ccw(c87.63,31.099) 87.63,30.845 115.554,30.845 ccw(c115.554,31.115) 115.824,31.115 115.824,38.1 cw(c116.832,38.1) 116.832,39.108 cw(c116.832,38.084) 117.856,38.084 117.856,37.338 117.856,33.385 117.856,33.274 ccw(c120.396,33.274) 120.396,30.734 120.65,30.734 161.29,30.734 ccw(c161.29,31.75) 162.306,31.75 162.306,61.33 ccw(c159.766,61.33) 161.562,63.126 160.578,64.111 160.399,64.29 cw(c162.195,66.086) 159.655,66.086 159.655,68.596 159.655,71.133 cw(c162.195,71.133) 160.399,72.929 160.846,73.376 161.59,74.12 ccw(c160.129,75.581) 162.195,75.581 ccw(c161.829,75.581) 161.829,75.946 161.544,75.946
BAT- on Top Layer "Bottom Layer-ControllerGND" (solid, shelved, pour order 18): 115.57,54.61 115.57,31.099 87.63,31.099 87.63,54.61
GND on Top Layer "Bottom Layer-No Net" (solid, shelved, pour order 9): 95.25,66.167 100.203,66.167 101.854,66.167 ccw(c101.854,67.056) 102.743,67.056 102.743,69.85 ccw(c101.854,69.85) 101.854,70.739 98.456,70.739 cw(c98.456,72.04) 97.536,71.12 ccw(c96.616,70.2) 96.616,71.501 94.615,71.501 93.069,71.501 ccw(c93.069,70.634) 92.456,71.247 92.397,71.188 cw(c91.313,72.272) 91.313,70.739 86.995,70.739 ccw(c86.995,70.358) 86.614,70.358 86.614,69.85 ccw(c87.122,69.85) 87.122,69.342 90.515,69.342 cw(c90.515,66.802) 92.311,68.598 93.472,67.437 94.383,66.526 ccw(c95.25,67.393) 95.25,66.167
no net on Bottom Solder "Bottom Layer-No Net" (solid, shelved, pour order 1): 132.207,51.308 132.207,51.054 ccw(c132.588,51.054) 132.588,50.673 135.001,50.673 ccw(c135.001,51.054) 135.382,51.054 135.382,51.562 ccw(c135.001,51.562) 135.001,51.943 132.588,51.943 ccw(c132.588,51.562) 132.207,51.562
no net on Bottom Solder "Bottom Layer-No Net" (solid, shelved, pour order 2): 134.747,52.959 cw(c134.366,52.959) 134.366,52.578 132.588,52.578 cw(c132.588,52.959) 132.207,52.959 132.207,53.467 cw(c132.588,53.467) 132.588,53.848 134.366,53.848 cw(c134.366,53.467) 134.747,53.467
no net on Bottom Solder "Bottom Layer-No Net" (solid, shelved, pour order 3): 132.207,54.864 ccw(c132.588,54.864) 132.588,54.483 132.842,54.483 133.858,54.483 ccw(c133.795,54.8) 134.112,54.864 134.112,55.372 ccw(c133.731,55.372) 133.731,55.753 132.588,55.753 ccw(c132.588,55.372) 132.207,55.372
no net on Bottom Solder "Bottom Layer-No Net" (solid, shelved, pour order 4): 125.857,53.213 125.857,53.467 cw(c126.238,53.467) 126.238,53.848 127,53.848 cw(c127,53.467) 127.381,53.467 127.381,52.959 cw(c127,52.959) 127,52.578 126.238,52.578 cw(c126.238,52.959) 125.857,52.959
GND on Bottom Solder "Bottom Layer-No Net" (solid, shelved, pour order 5): 131.826,53.213 131.826,56.007 ccw(c131.445,56.007) 131.445,56.388 130.302,56.388 ccw(c130.302,53.848) 127.762,53.848 127.762,53.213 127.762,52.578 ccw(c130.302,52.578) 130.302,50.038 131.445,50.038 ccw(c131.445,50.419) 131.826,50.419 131.826,50.8 131.826,53.213 130.937,53.086 130.937,51.308 cw(c130.556,51.308) 130.556,50.927 cw(c130.556,52.705) 128.778,52.705 128.778,53.213 128.778,53.721 cw(c130.556,53.721) 130.556,55.499 cw(c130.556,55.118) 130.937,55.118 130.937,53.34 cw(c129.648,53.213) 130.937,53.086
GND on Bottom Solder "Bottom Layer-No Net" (solid, shelved, pour order 6): 129.286,53.213 129.286,53.467 cw(c129.921,53.467) 129.921,54.102 cw(c129.921,53.467) 130.556,53.467 130.556,53.213 130.556,52.959 cw(c129.921,52.959) 129.921,52.324 cw(c129.921,52.959) 129.286,52.959 129.286,53.213
no net on Bottom Overlay (solid, shelved): 134.62,41.402 cw(c134.62,40.894) 135.128,40.894 135.382,40.64 cw(c134.59,39.953) 135.636,39.878 cw(c134.41,39.878) 135.277,39.011 135.128,38.862 cw(c134.112,38.862) 134.112,37.846 133.963,37.697 cw(c133.53,38.385) 133.35,37.592 cw(c133.096,38.1) 132.588,37.846 cw(c132.588,38.862) 131.572,38.849 cw(c131.938,39.601) 131.554,40.343 131.594,40.437 cw(c132.614,40.545) 132.748,41.562 cw(c133.604,40.684) 133.604,41.91 cw(c133.604,40.684) 134.471,41.551
no net on Bottom Overlay (solid, shelved): 132.08,42.164

## Keep-outs
Keep-Out Layer:
  lines w0.025: 115.75,38.026 115.75,30.75 87.5,30.75 87.5,35.436 87.5,37.96 87.376,38.084 ccw(c86.36,38.084) 86.36,39.1 ccw(c86.36,38.084) 85.344,38.084 85.344,34.036 85.344,33.274 cw(c82.804,33.274) 82.804,30.734 41.91,30.734 cw(c41.91,31.75) 40.894,31.75 40.894,74.93 cw(c41.91,74.93) 41.91,75.946 42.672,75.946 43.434,75.946 161.544,75.946 161.829,75.946 cw(c161.829,75.581) 162.195,75.581 cw(c160.129,75.581) 161.59,74.12 160.846,73.376 160.399,72.929 ccw(c162.195,71.133) 159.655,71.133 159.655,68.596 159.655,66.086 ccw(c162.195,66.086) 160.399,64.29 160.578,64.111 161.562,63.126 cw(c159.766,61.33) 162.306,61.33 162.306,31.75 cw(c161.29,31.75) 161.29,30.734 120.65,30.734 120.396,30.734 cw(c120.396,33.274) 117.856,33.274 117.856,33.385 117.856,37.338 117.856,38.084 ccw(c116.832,38.084) 116.832,39.108 ; 115.75,38.25 cw(c116.758,38.25) 116.75,39.258 ; 85.36,46.974 ccw(c86.36,46.974) 87.36,46.974 87.75,47.364 87.75,54.25 115.75,54.25 115.75,47.048 115.824,46.974 ccw(c116.84,46.974) 117.856,46.974 117.856,53.959 ccw(c115.586,53.959) 115.586,56.23 87.63,56.23 ccw(c87.63,53.959) 85.36,53.959 85.36,46.974 ; 85.364,41.97 ccw(c86.372,41.97) 87.38,41.97 87.372,42.866 ccw(c86.372,42.866) 85.371,42.866 85.364,41.97 ; 115.844,41.97 ccw(c116.852,41.97) 117.86,41.97 117.852,42.866 ccw(c116.852,42.866) 115.851,42.866 115.844,41.97

## Other copper
Top Layer:
  rectangle: 107.442,60.594 116.93,70.104
  rectangle: 94.996,66.294 98.806,70.612
  rectangle: 93.98,67.818 96.647,70.231
  rectangle: 94.732,68.628 97.399,71.041
  region: 103.632,73.406
Bottom Layer:
  rectangle net REG_TH: 134.366,67.056 136.144,68.326
  rectangle net BAT-: 113.284,36.068 115.062,40.894

## Silkscreen, mask and mechanical layers (free items; w line width, h text height)
Top Overlay:
  lines w0.254: 85.852,63.5 ccw(c85.979,63.5) 85.979,63.373 ccw(c85.979,63.5) 86.106,63.5 ccw(c85.979,63.5) 85.979,63.627 ccw(c85.979,63.5) 85.852,63.5 ; 209,57 209,102 254,102 254,57 209,57
Bottom Overlay:
  lines w0.254: 112.132,48.743 112.132,48.108 112.767,48.108 112.767,49.505 113.402,49.505 113.402,48.108 114.037,48.108 114.037,49.505 114.672,49.505 114.672,48.87 ; 126.238,39.624 126.864,38.998 ccw(c129.032,41.166) 129.032,38.1 129.33,38.1 ccw(c129.33,39.834) 130.556,38.608 ; 130.048,38.608 130.556,38.608 ; 130.376,38.174 ccw(c129.943,38.608) 130.556,38.608 ; 135.856,53.848 136.779,53.848 ; 138.176,51.528 138.176,52.451 ; 138.176,55.245 138.176,56.168 ; 139.573,53.848 140.496,53.848 ; 139.995,53.848 ccw(c138.176,53.848) 139.995,53.848
  text "test / rst / tx / rx / gnd" at 78.867,72.898 h3.3 r90
  text "Kretsn-glasögon V2.1 / Mandus Börjesson / \".1\" by Albin Lejåker" at 64.516,69.723 h1.52
  text "Lenz way" at 119.761,62.433 h3.56 r341.78
  text "Ω ser allt" at 135.382,59.944 h3.56
  text "Hjälp mig! /  -Einwar" at 68.834,56.134 h2.03
  text "copypasta rights / Lütz von lackmeister®" at 111.252,55.626 h3.56
  text "[-]" at 104.14,53.975 h2.03 r90
  text "Specs: / MSP430G2553 / 2x RGB Leds / 2x 8-by-8 matrix / 1/8th duty / 3x Indicator LEDs / 1x IR reciever / 1x Microphone / 1x Accelerometer / Analog controller" at 85.344,38.989 h1.52
  text "inte kul" at 127,38.862 h2.03 r346.6
  text "[+]" at 102.235,33.02 h2.03 r90
  text "Owner:" at 85.344,30.734 h3.56
Top Solder:
  text "Ω" at 116.078,60.96 h12.7